# Altium PCB PCB_2.PcbDoc
Units mm, origin at the board's own origin, x right, y up, seen from the top; angles counter-clockwise.
Board outline 50.97 x 42.08 mm, 2 copper layers (Top Layer, Bottom Layer); 26 components, 17 nets, 56 pads, 0 vias.
Unrouted connection lines stored in the file: 36.
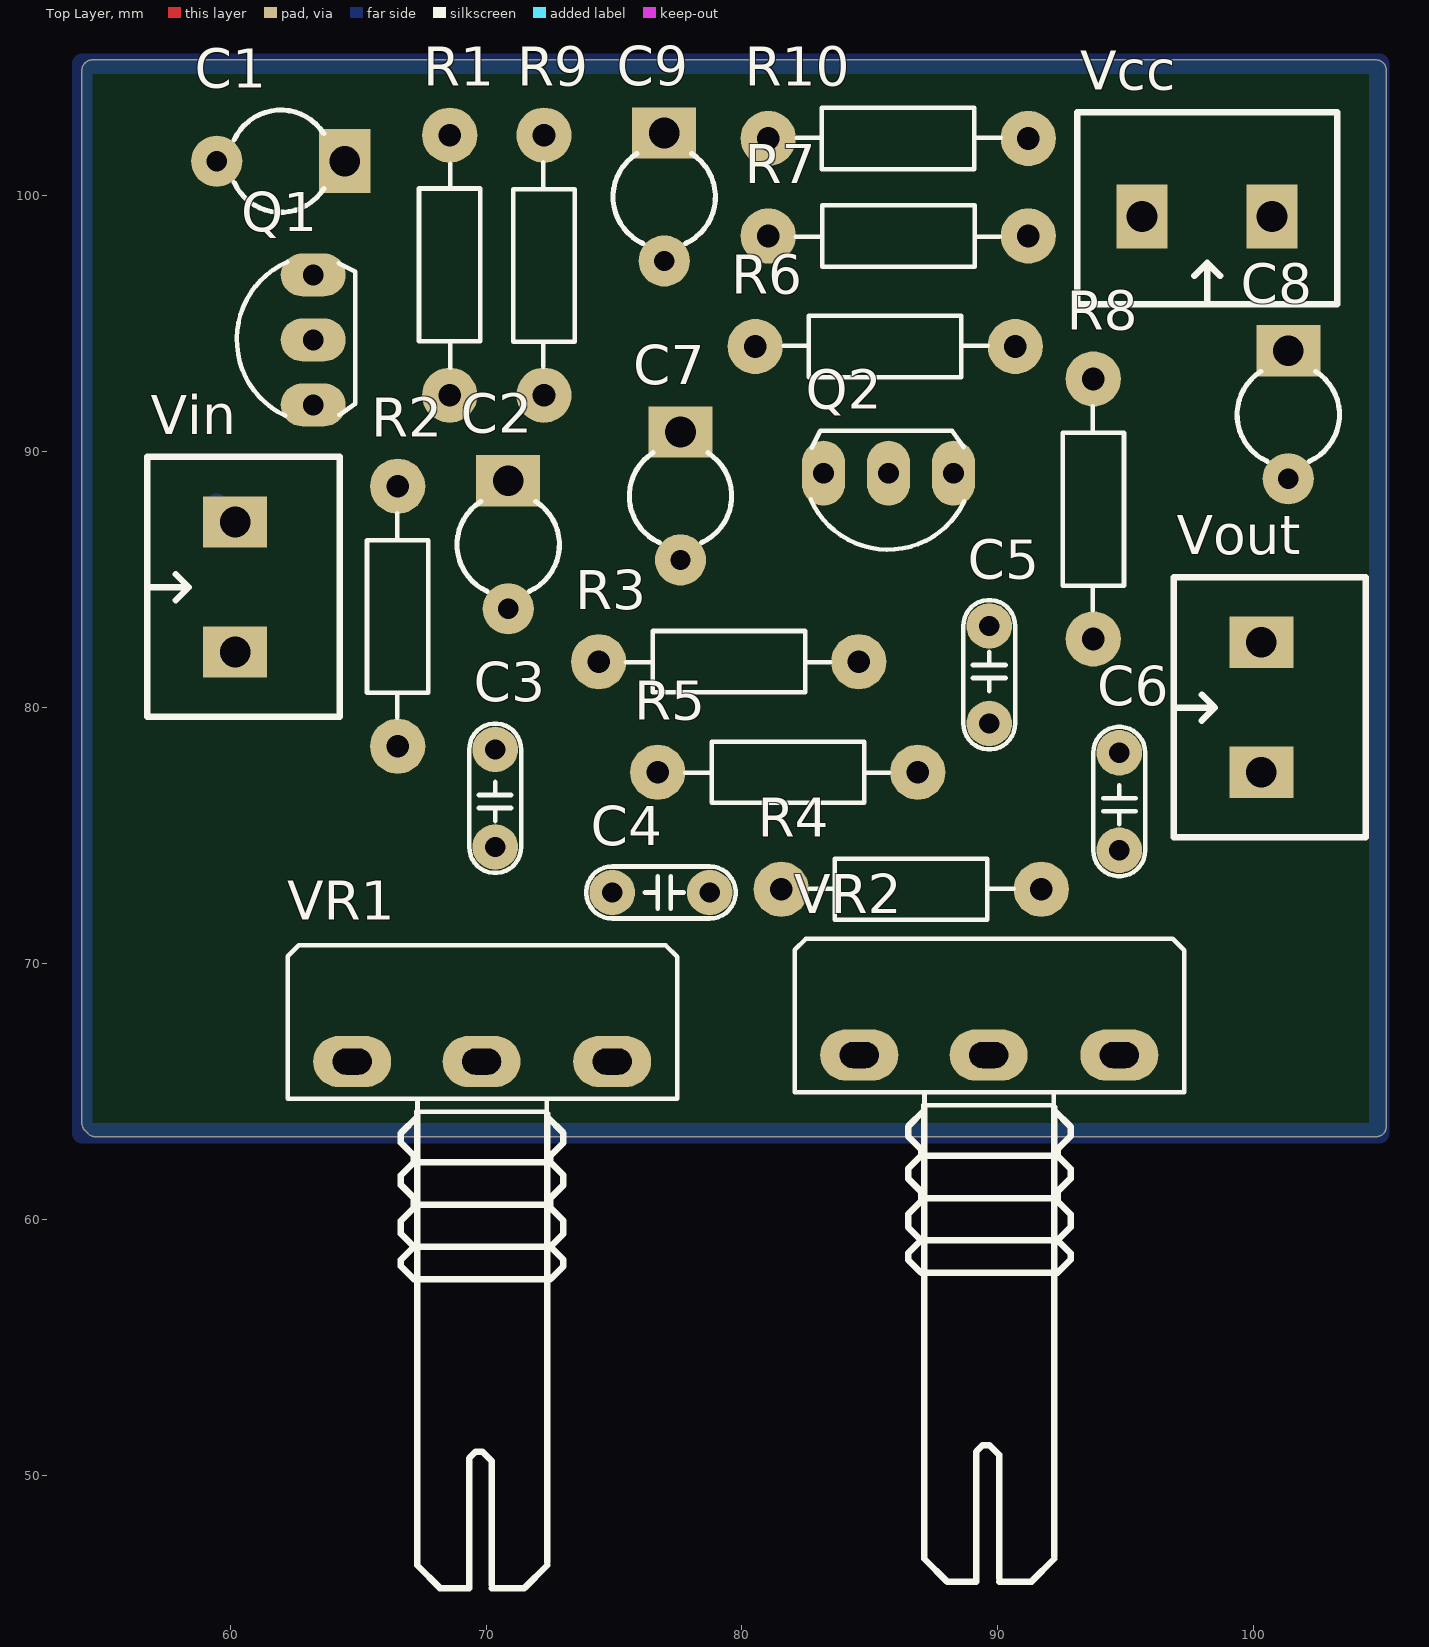
[diagram p0: Top Layer view]
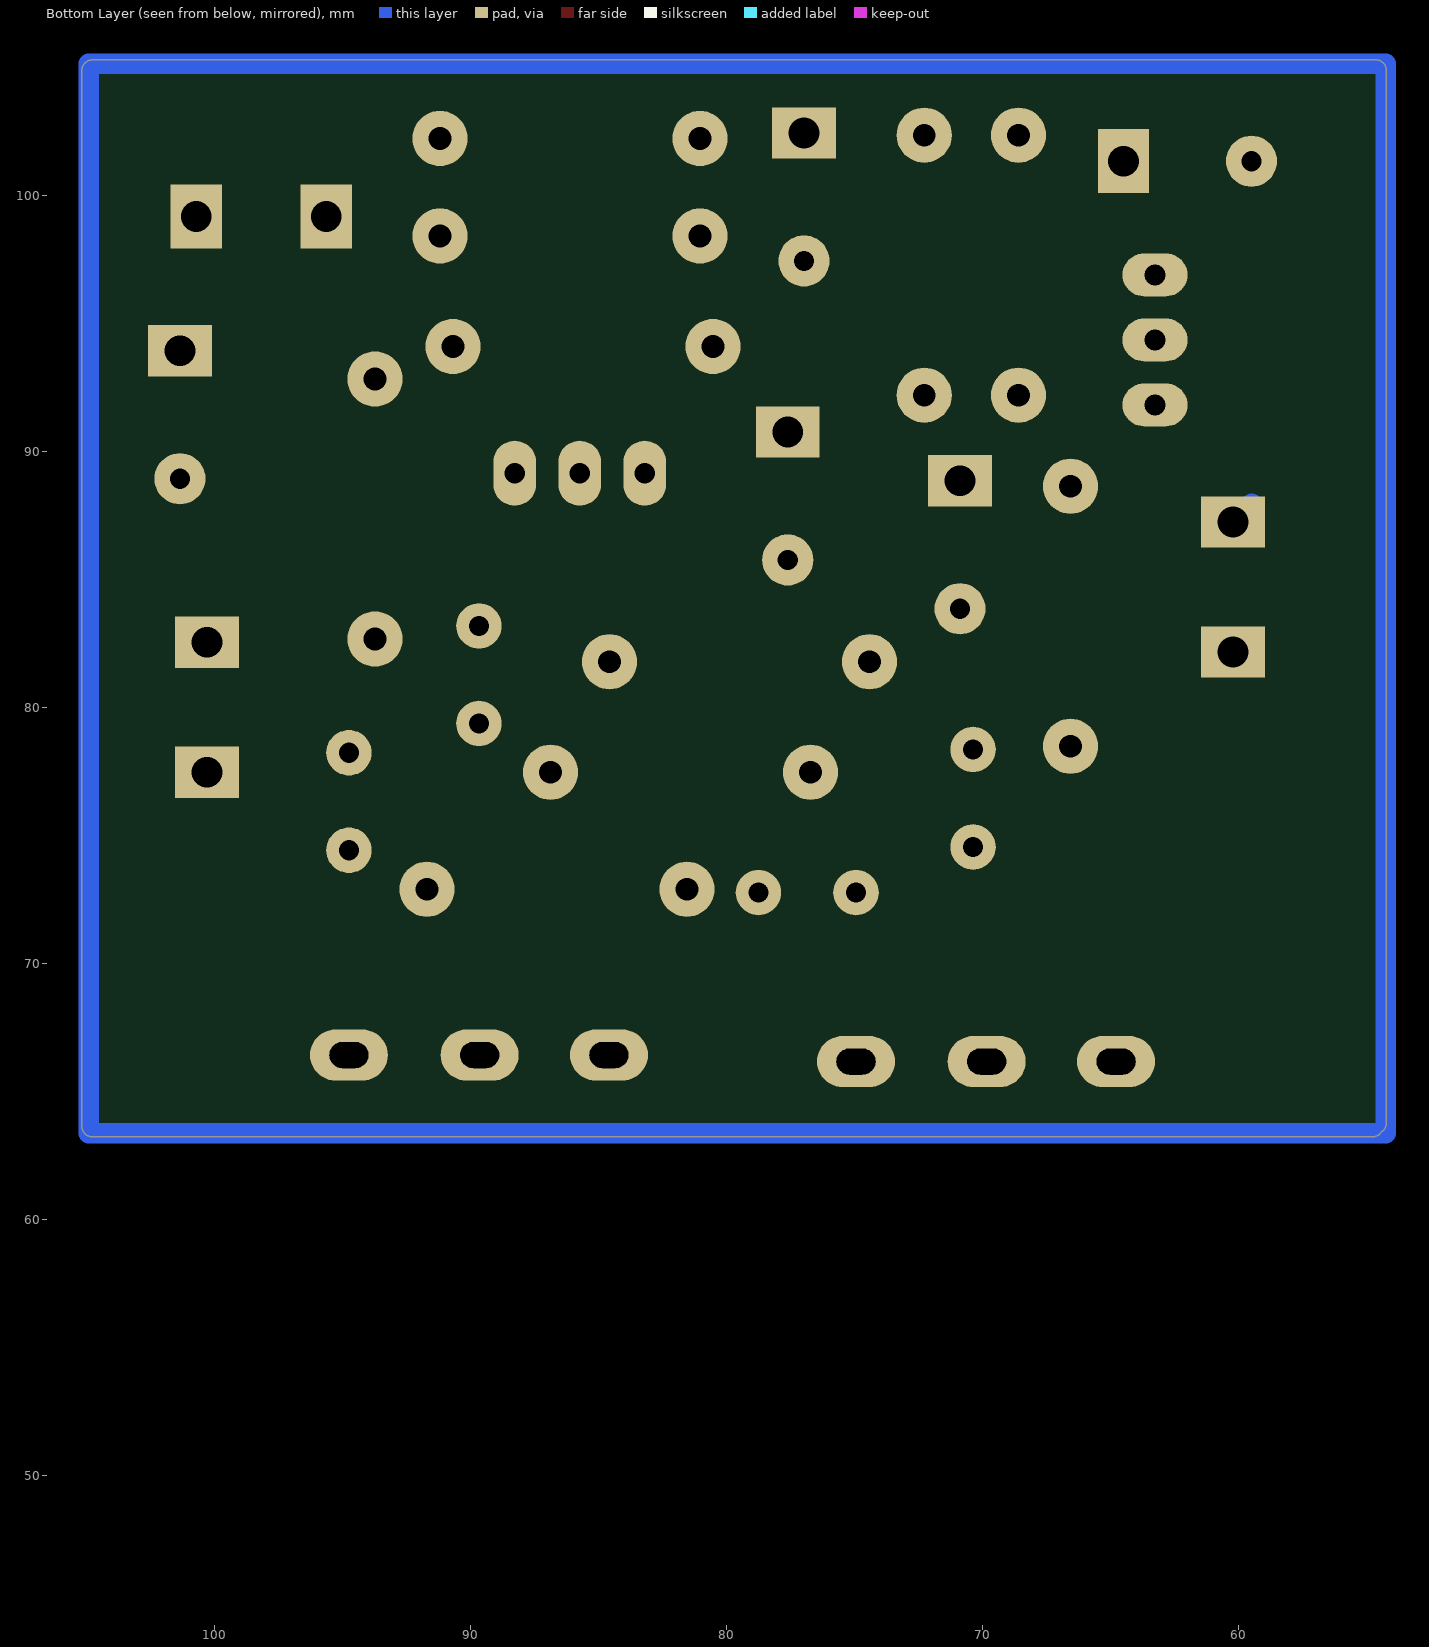
[diagram p1: Bottom Layer view, seen from below]

## Layer stack, top to bottom
Top Solder: solder mask 0.0102, Solder Resist, Dk 3.5
Top Layer: signal copper 0.0356
Dielectric 1: dielectric 0.32, FR-4, Dk 4.8
Bottom Layer: signal copper 0.0356
Bottom Solder: solder mask 0.0102, Solder Resist, Dk 3.5

## Board outline
54.398,63.415 cw(c54.61,63.754) 54.21,63.754 54.21,104.902 cw(c54.61,104.902) 54.61,105.302 104.775,105.302 cw(c104.775,104.902) 105.175,104.902 105.175,63.627 cw(c104.775,63.627) 104.775,63.227 54.737,63.227 cw(c54.737,63.627)

## Design rules (kind name [scope] priority, off if disabled: settings)
Clearance [All] p1: gap=0.4
PolygonConnect [All] p1: connectstyle=Relief reliefconductorwidth=0.254 reliefentries=4 polygonreliefangle="90 Angle" airgapwidth=0.254
RoutingVias [All] p1: holewidth=0.711 width=1.27 viastyle="Through Hole" minholewidth=0.711 minwidth=1.27 maxholewidth=0.711 maxwidth=1.27
SolderMaskExpansion [All] p1: expansion=0.102
Width [All] p1: maxlimit=1 minlimit=0.8 preferedwidth=0.8
30 further rules are at their usual default settings.

## Components (designator, comment, footprint, x,y, rotation, side; value= is the part's Value field where it differs from the comment)
C1 "Cap2" CAPR5-4X5 61.976,101.346 r180 top
C2 "Cap2" CAPR5-4X5 70.866,86.36 r270 top
C3 "Cap Non-Pol" CN1.5 70.358,74.549 r90 top
C4 "Cap Non-Pol" CN1.5 78.74,72.771 r180 top
C5 "Cap Non-Pol" CN1.5 89.662,83.185 r270 top
C6 "Cap Non-Pol" CN1.5 94.742,74.422 r90 top
C7 "Cap2" CAPR5-4X5 77.597,88.265 r270 top
C8 "Cap2" CAPR5-4X5 101.346,91.44 r270 top
C9 "Cap2" CAPR5-4X5 76.962,99.949 r270 top
Q1 "C1815" QTO-92 63.246,94.361 r90 top
Q2 "C1815" QTO-92 85.725,89.154 r180 top
R1 "1Meg" RES-1/4W 68.707,97.663 r90 top
R2 "220" RES-1/4W 66.421,83.185 r270 top
R3 "12K" RES-1/4W 79.862,81.661 r0 top
R4 "1.2K" RES-1/4W 86.233,73.025 r180 top
R5 "10K" RES-1/4W 82.169,77.343 r0 top
R6 "1Meg" RES-1/4W 85.217,94.234 r180 top
R7 "10K" RES-1/4W 86.487,98.298 r0 top
R8 "120" RES-1/4W 93.599,87.376 r270 top
R9 "15K" RES-1/4W 72.136,96.901 r270 top
R10 "4.7K" RES-1/4W 85.725,102.362 r180 top
Vcc "Domino 2" "DOMINO 2- 5mm" 98.171,99.187 r180 top
Vin "Domino 2" "DOMINO 2- 5mm" 60.198,84.709 r90 top
Vout "Domino 2" "DOMINO 2- 5mm" 100.292,80.01 r90 top
VR1 "50K" VR-S1 69.85,66.167 r0 top
VR2 "50K" VR-S1 89.662,66.421 r0 top

## Footprints (in the part's own frame and the unit in brackets; to place one, negate y for a bottom-side part, rotate by r counter-clockwise, add the part's x,y. Pads: shape width x height; smd on the part's side, far side on the other; paste and mask are expansions set on the pad)
CAPR5-4X5 [mm] "Capacitor; 2 Leads"
  rect 2x2.5 hole 1.2: 1(-2.5,0)
  round 2 hole 0.787: 2(2.5,0)
  silkscreen extent -1.69,-2 1.82,2
CN1.5 [mil]
  round 70 hole 31: 1(0,0) 2(150,0)
  silkscreen extent -40,-40 190,40, body extent -40,-33 190,33, height 235
"DOMINO 2- 5mm" [mm]
  rect 2x2.5 hole 1.2: 1(-2.54,0) 2(2.54,0)
  silkscreen extent -5.08,-4.08 5.08,3.43, body extent -5,-4.07 5,3.43, height 10
QTO-92 [mil] "TO-92"
  oval 66x100 hole 32: 1(-100,0) 2(0,0) 3(100,0)
  silkscreen extent -117,-65 120,118, body extent -109,-66 109,95, height 245
RES-1/4W [mil]
  round 85 hole 35: 1(-215,5) 2(185,5)
  silkscreen extent -173,-42 141,52, body extent -227,-42 197,52, height 95
VR-S1 [mil]
  oval 120x78.74 hole 40 slot 60 at 0 deg: 1(-200,0) 2(-1,0) 3(200,0)
  silkscreen extent -299,-810 300,179, body extent -310,-818 310,188, height 839

## Part data
C1 C2 C3 C4 C5 C6 C7 C8 C9: "Capacitor"
Q1 Q2: "NPN Bipolar Transistor"
R1 R2 R3 R4 R5 R6 R7 R8 R9 R10: library part Res, "Res"
Vcc Vin Vout: "Domino, 2-Pin"
VR1 VR2: library part VR-S, "Var Resistor"

## Nets (pads, with @x,y where several pads share a name; then routed paths per layer and width w, separated by ;. In a path a pad name is that pad's centre, name@x,y a point inside that pad or via, vN(x,y) a via of type N, cw(c..) or ccw(c..) an arc to the next point about the centre after c; other vN are vias at no path point)
GND: C4.1 C9.2 R2.2 R4.2 R8.2 Vcc.1 Vout.1
NetC1_1: C1.1 Q1.3 R1.2
NetC2_1: C2.1 Q1.2 R1.1 R9.2
NetC2_2: C2.2 C3.2 R3.1
NetC3_1: C3.1 VR1.1
NetC4_2: C4.2 VR1.3
NetC5_1: C5.1 R3.2 VR2.1
NetC5_2: C5.2 C6.2 R5.2 VR2.2
NetC6_1: C6.1 R4.1 VR2.3
NetC7_1: C7.1 Q2.3 R6.2
NetC7_2: C7.2 R5.1 VR1.2
NetC8_1: C8.1 Q2.2 R6.1 R7.2
NetC8_2: C8.2 Vout.2
NetC9_1: C9.1 R7.1 R9.1 R10.2
NetQ1_1: Q1.1 R2.1
NetQ2_1: Q2.1 R8.1
NetR10_1: R10.1 Vcc.2
pads on no net: C1.2 Vin.1 Vin.2
copper on no net: | length 185.9
  Bottom Layer w0.8: 59.476,87.971 60.198,87.249 ; 54.229,63.373 54.229,105.156 104.902,105.156 104.902,63.373 54.229,63.373